# Altium PCB ECE453.PcbDoc
Units mm, origin at the board's own origin, x right, y up, seen from the top; angles counter-clockwise.
Board outline 95 x 95 mm, 2 copper layers (Top Layer, Bottom Layer); 22 components, 23 nets, 82 pads, 46 vias.
Unrouted connection lines stored in the file: 41.
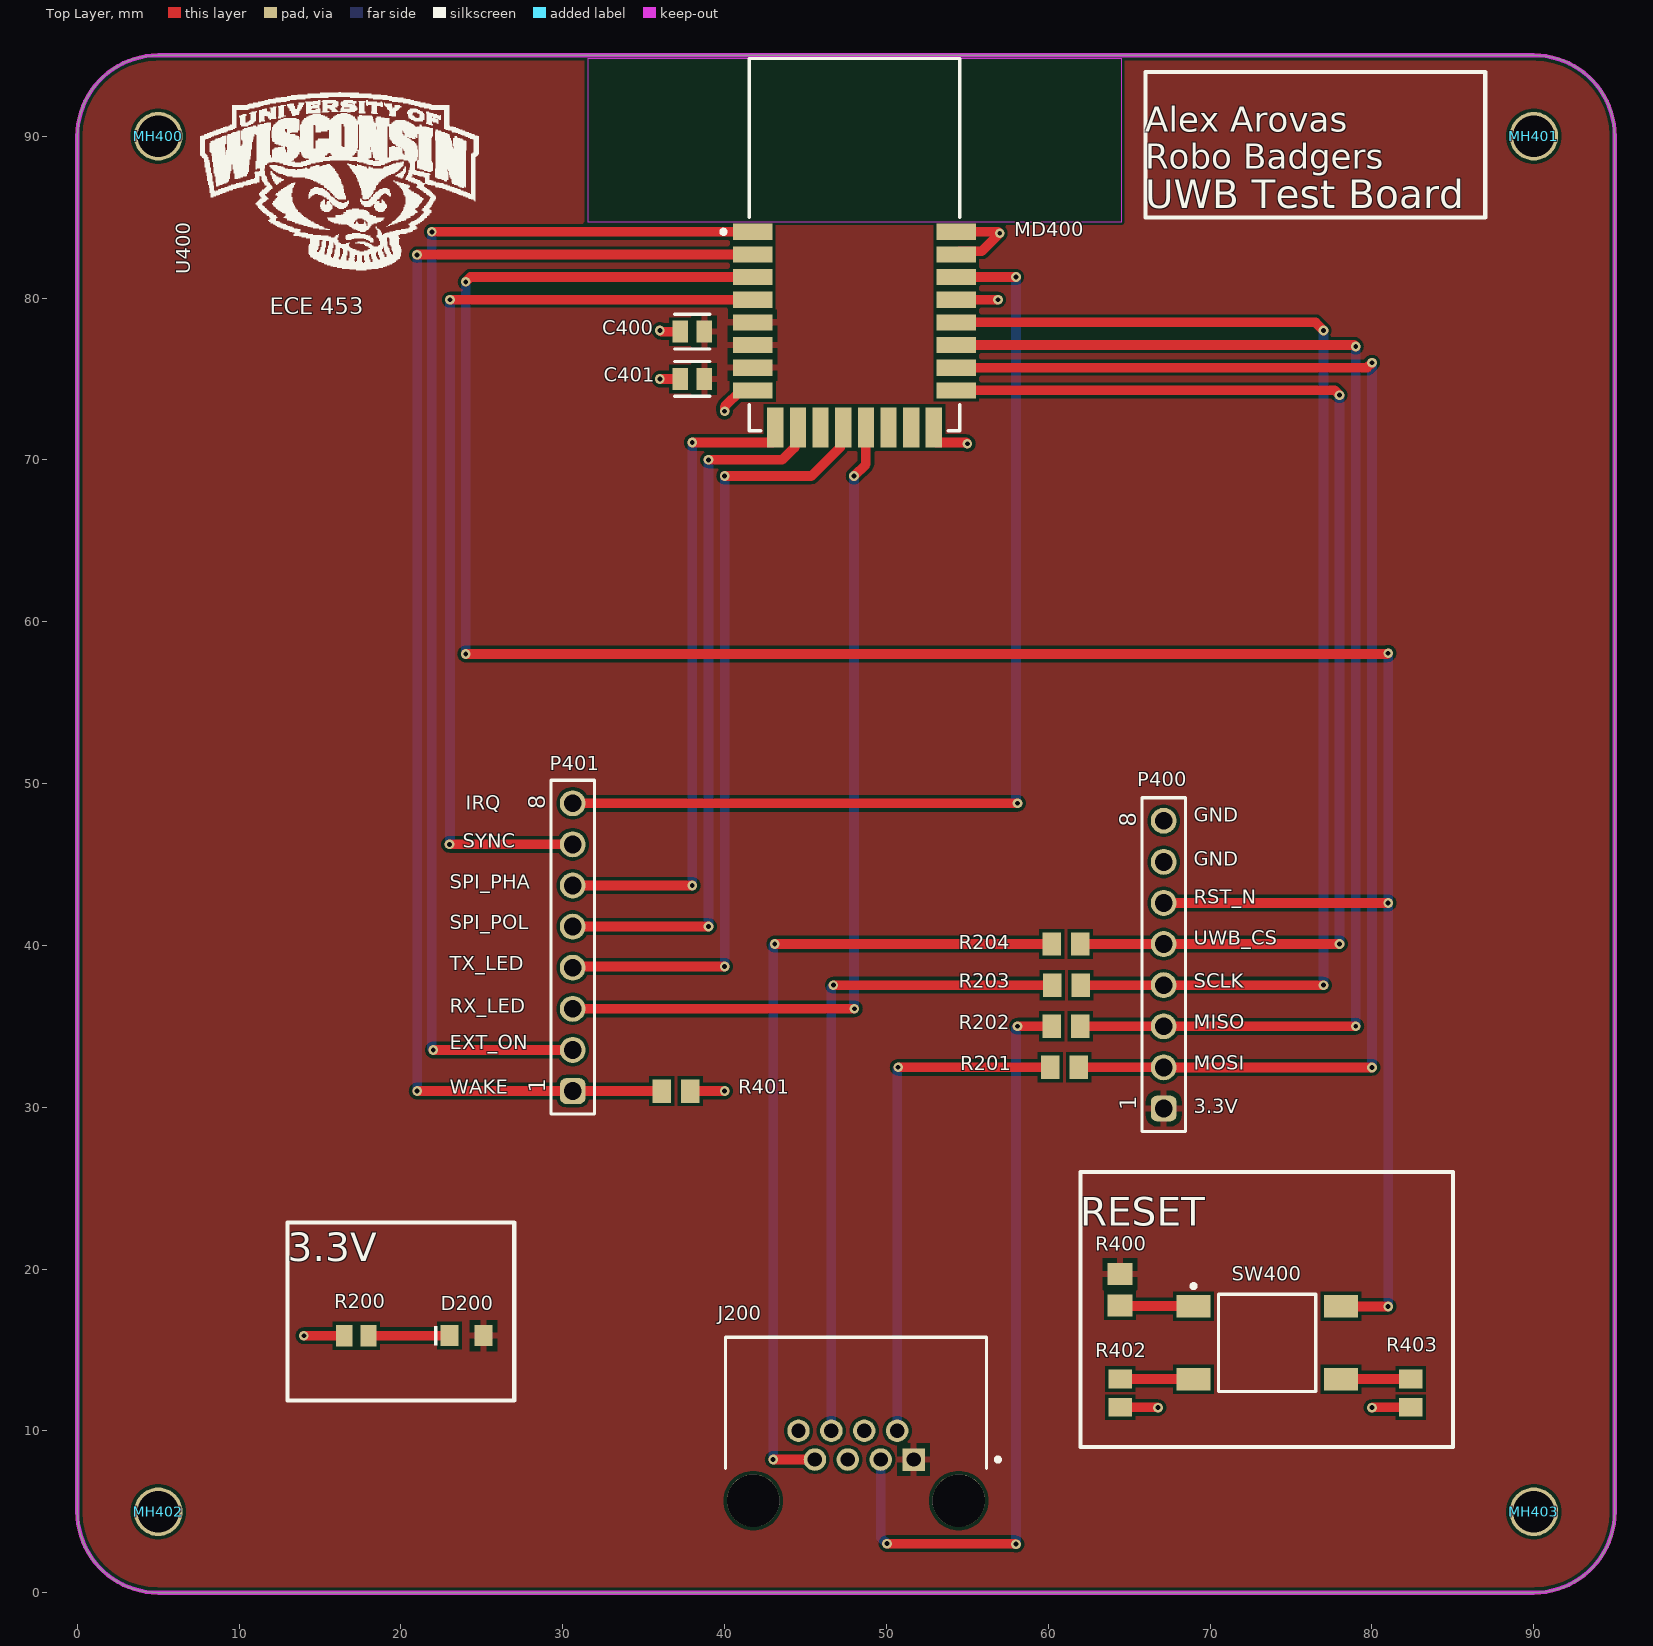
[diagram p0: Top Layer view]
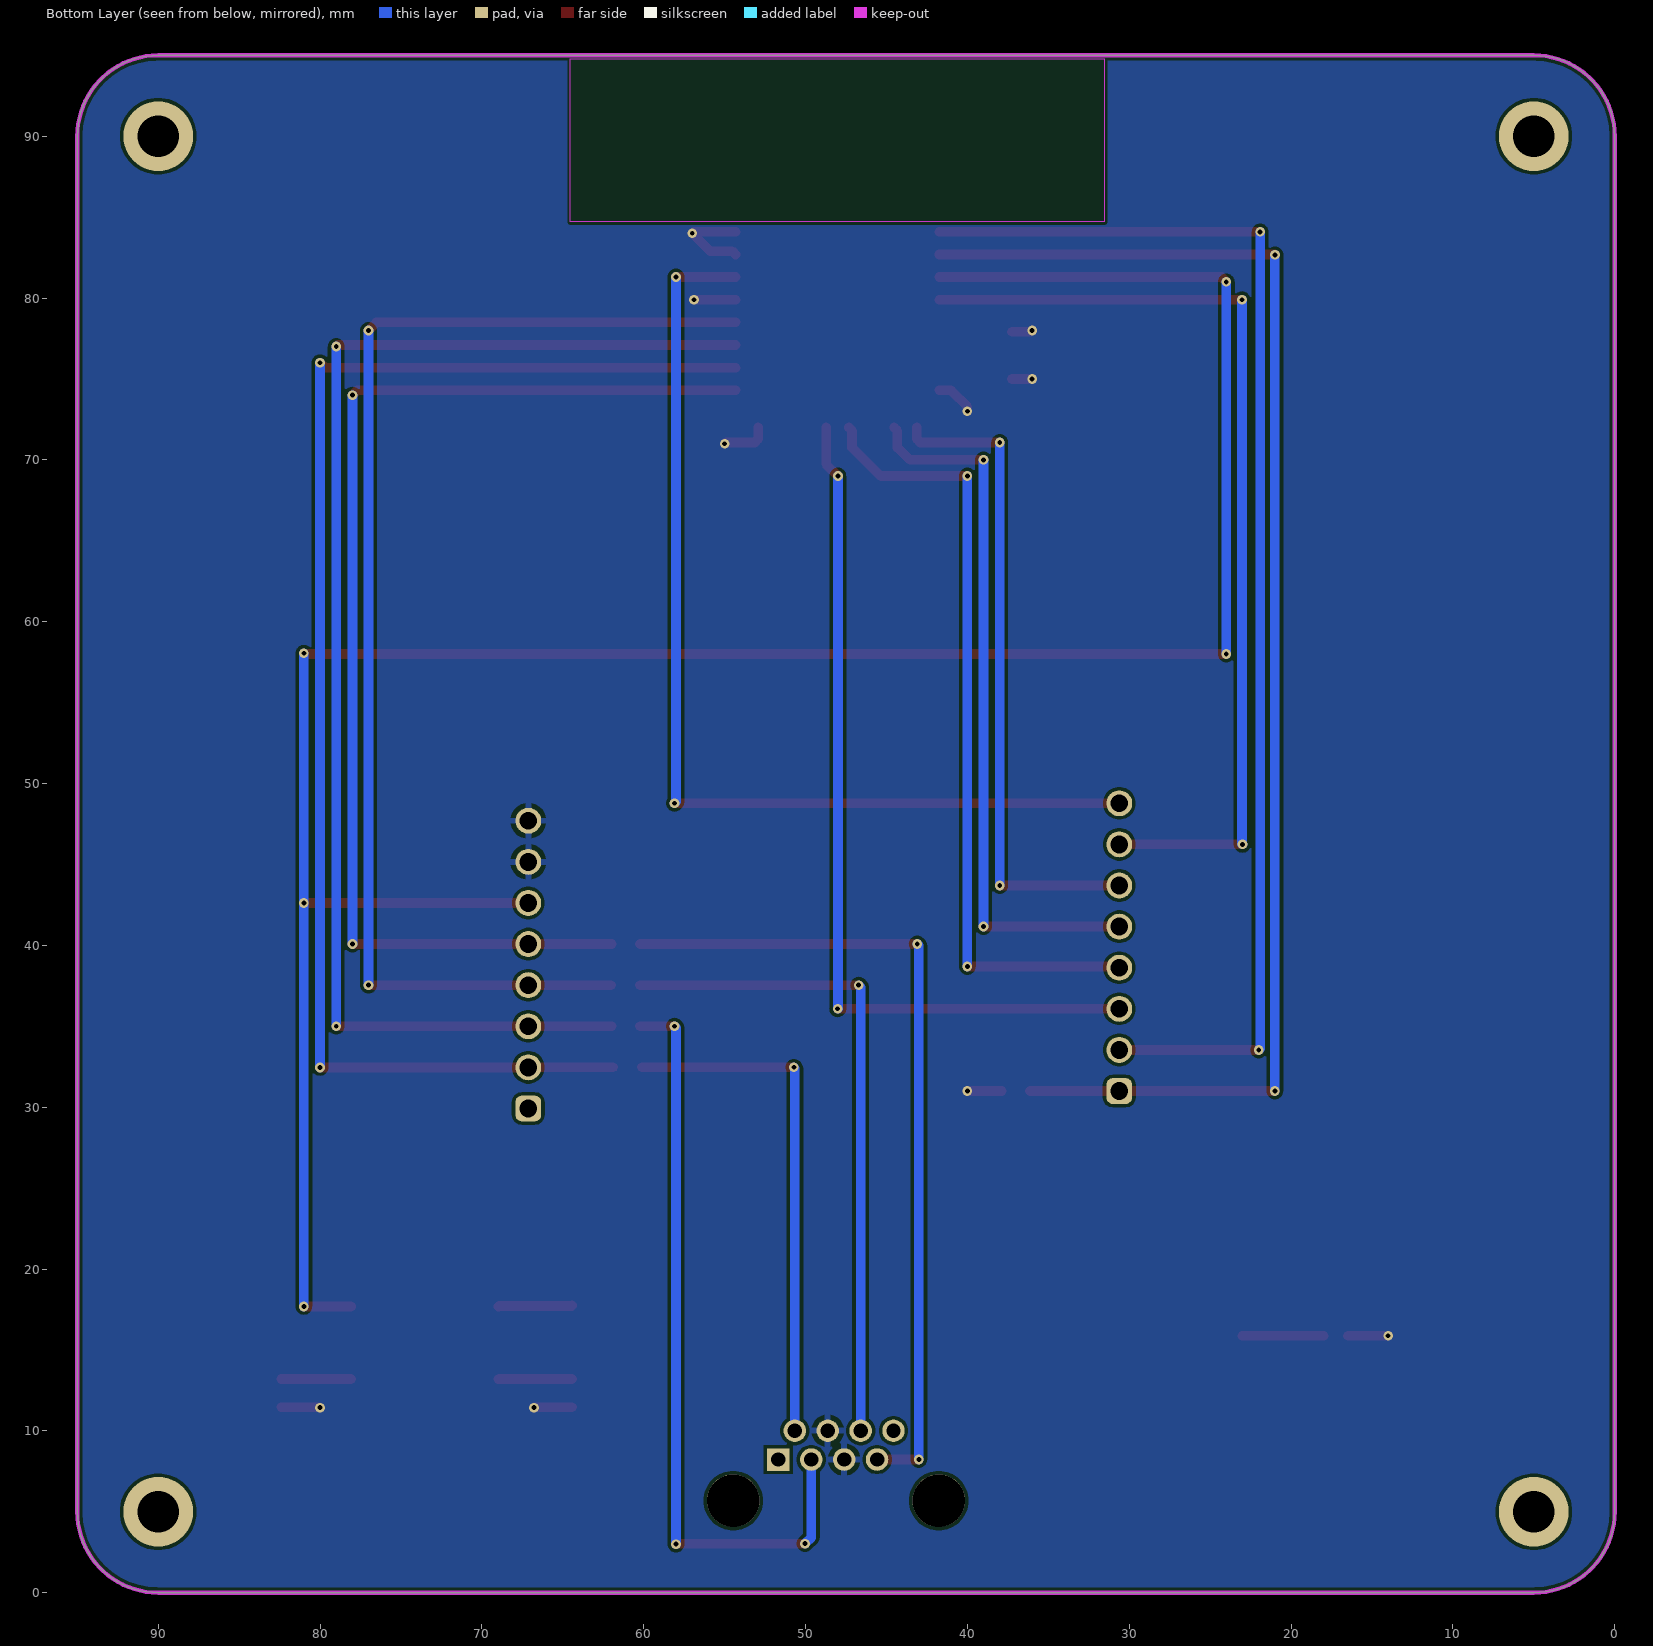
[diagram p1: Bottom Layer view, seen from below]

## Layer stack, top to bottom
Top Solder: solder mask 0.0102, Solder Resist, Dk 3.5
Top Layer: signal copper 0.0356
Dielectric1: dielectric 0.32, FR-4, Dk 4.8
Bottom Layer: signal copper 0.0356
Bottom Solder: solder mask 0.0102, Solder Resist, Dk 3.5

## Board outline
0,5 ccw(c5,5) 5,0 90,0 ccw(c90,5) 95,5 95,90 ccw(c90,90) 90,95 5,95 ccw(c5,90) 0,90

## Design rules (kind name [scope] priority, off if disabled: settings)
Clearance Polygon_Clearance [All vs InPolygon] p1: gap=0.2 ignorepadtopadclearanceinfootprint=FALSE
Clearance [All] p2: gap=0.2 ignorepadtopadclearanceinfootprint=TRUE
ComponentClearance [InComponent('U3')] p1: gap=0 collisioncheckmode=3 verticalgap=0.254 showdistances=FALSE
Height [All] p1: minheight=0 maxheight=75 prefheight=12.7
HoleSize [All] p1: absolutevalues=TRUE maxlimit=6.35 minlimit=0.3 maxpercent=80.000 minpercent=20.000
MinimumAnnularRing [All] p1: minimumring=0.15
MinimumSolderMaskSliver [All] p1: minsoldermaskwidth=0.22
NetAntennae NetAntennae_5.0V [InNet('5.0V')] p1: netantennaetolerance=0
NetAntennae NetAntennae_3.3V [InNet('3.3V')] p2: netantennaetolerance=0
PlaneClearance [All] p1: clearance=0.3
PlaneConnect [All] p1: planeconnectstyle=Relief reliefexpansion=0.3 reliefentries=4 reliefconductorwidth=0.3 reliefairgap=0.3
PolygonConnect ViaConnect [All vs IsVia] p1: connectstyle=Direct reliefconductorwidth=0.381 reliefentries=4 polygonreliefangle="90 Angle" airgapwidth=0.254
PolygonConnect [All] p2: connectstyle=Relief reliefconductorwidth=0.4 reliefentries=4 polygonreliefangle="90 Angle" airgapwidth=0.3
RoutingVias [All] p1: holewidth=0.3 width=0.6 viastyle="Through Hole" minholewidth=0.3 minwidth=0.6 maxholewidth=5 maxwidth=10
SilkToSilkClearance [All] p1: silktosilkclearance=0
SilkToSolderMaskClearance [IsPad] p1: minsilkscreentomaskgap=0 clearancetoexposedcopper=TRUE
SolderMaskExpansion [All] p1: expansion=0.102 istentingtop=FALSE
UnConnectedPin [All] p1:
Width [All] p1: maxlimit=10 minlimit=0.2 preferedwidth=0.6
21 further rules are at their usual default settings.

## Classes and differential pairs
component class 04_Mechanical: C400 C401 MD400 MH400 MH401 MH402 MH403 P400 P401 R400 R401 R402 R403 SW400 U1 U400

## Components (designator, comment, footprint, x,y, rotation, side; value= is the part's Value field where it differs from the comment)
C400 "0.10 μF" FP-C0805C-DN-MFG 38,77.922 r180 top
C401 "0.10 μF" FP-C0805C-DN-MFG 38,75 r180 top
D200 "150080GS75000" WL-SMCW_0805_150080xx75000 24.05,15.88 r0 top
J200 "RJHSE-5080" FP-RJHSE-5080-MFG 48.121,8.104 r0 top
MD400 "DWM3000TR13" FP-DWM3000TR13-MFG 48.027,83.295 r0 top
MH400 "MHOLE_2_55MM" MHOLE_2_55MM 5,90 r0 top
MH401 "MHOLE_2_55MM" MHOLE_2_55MM 90,90 r0 top
MH402 "MHOLE_2_55MM" MHOLE_2_55MM 5,5 r0 top locked
MH403 "MHOLE_2_55MM" MHOLE_2_55MM 90,5 r0 top
P400 "61300811121" 61300811121 67.132,38.81 r90 top
P401 "61300811121" 61300811121 30.614,39.89 r90 top
R200 "330R" RESC2013X60X40LL20T25 17.25,15.88 r180 top
R201 "0R" RESC2013X70X40NL20T20 61.003,32.466 r0 top
R202 "0R" RESC2013X70X40NL20T20 61.1,35.006 r0 top
R203 "0R" RESC2013X70X40NL20T20 61.125,37.541 r0 top
R204 "0R" RESC2013X70X40NL20T20 61.1,40.086 r0 top
R400 "10kR" RESC2013X70X40ML20T20 64.434,18.725 r90 top
R401 "0R" RESC2013X70X40NL20T20 37,31 r0 top
R402 "0R" RESC2013X70X40NL20T20 64.434,12.333 r90 top
R403 "0R" RESC2013X70X40NL20T20 82.393,12.333 r90 top
SW400 "" TECO-FSM4JSMA_V 73.523,15.441 r90 top
U400 "Bucky" WalkingBucky 15,80 r0 top

## Footprints (in the part's own frame and the unit in brackets; to place one, negate y for a bottom-side part, rotate by r counter-clockwise, add the part's x,y. Pads: shape width x height; smd on the part's side, far side on the other; paste and mask are expansions set on the pad)
61300811121 [mm] "Pin Header, pitch 2.54 mm, THT, Vertical, single row, 8p"
  rrect50% 1.6x1.6 hole 1.1: 1(-8.89,0)
  round 1.6 hole 1.1: 2(-6.35,0) 3(-3.81,0) 4(-1.27,0) 5(1.27,0) 6(3.81,0) 7(6.35,0) 8(8.89,0)
  silkscreen extent -10.31,-1.35 10.31,1.35, body extent -10.16,-1.27 10.16,1.27, height 8.57
FP-C0805C-DN-MFG [mm]
  rect 0.95x1.35 smd paste+0 mask+0: 1(-0.75,0) 2(0.75,0)
  silkscreen extent -1.1,-1.07 1.1,1.07, body extent -1.4,-0.85 1.4,0.85, height 0.25
FP-DWM3000TR13-MFG [mm]
  rect 2.45x1 smd paste+0 mask+0: 1(-6.295,0.8) 2(-6.295,-0.6) 3(-6.295,-2) 4(-6.295,-3.4) 5(-6.295,-4.8) 6(-6.295,-6.2) 7(-6.295,-7.6) 8(-6.295,-9) 17(6.295,-9) 18(6.295,-7.6) 19(6.295,-6.2) 20(6.295,-4.8) 21(6.295,-3.4) 22(6.295,-2) 23(6.295,-0.6) 24(6.295,0.8)
  rect 1x2.45 smd paste+0 mask+0: 9(-4.9,-11.295) 10(-3.5,-11.295) 11(-2.1,-11.295) 12(-0.7,-11.295) 13(0.7,-11.295) 14(2.1,-11.295) 15(3.5,-11.295) 16(4.9,-11.295)
  Keep-Out Layer region: -16.5,1.42 16.5,1.42 16.5,11.495 -16.5,11.495
  Keep-Out Layer region: -16.5,1.42 16.5,1.42 16.5,11.495 -16.5,11.495
  silkscreen extent -8.22,-11.5 6.5,11.5, body extent -7.62,-12.62 7.62,11.6, height 0.25
FP-RJHSE-5080-MFG [mm]
  rect 1.39x1.39 hole 0.89 paste-1000 mask+0: 1(3.556,0.127)
  round 1.39 hole 0.89 paste-1000 mask+0: 2(2.54,1.905) 3(1.524,0.127) 4(0.508,1.905) 5(-0.508,0.127) 6(-1.524,1.905) 7(-2.54,0.127) 8(-3.556,1.905)
  round 3.25 hole 3.25 unplated paste-1000 mask+0: ""(-6.35,-2.413) ""(6.35,-2.413)
  silkscreen extent -8.06,-0.41 8.89,7.68, body extent -8.16,-7.78 8.16,7.78, height 0.25
MHOLE_2_55MM [mm]
  round 3 / inner round 4.572 / far side round 4.318 hole 2.55: 1(0,0)
RESC2013X60X40LL20T25 [mm] "Chip Resistor, 2-Leads, Body 2.00x1.25mm, IPC High Density"
  rect 1x1.35 smd: 1(-0.75,0) 2(0.75,0)
  body extent -1.1,-0.72 1.1,0.72, height 0.6
RESC2013X70X40ML20T20 [mm] "Chip Resistor, 2-Leads, Body 2.00x1.25mm, IPC Low Density"
  rect 1.35x1.55 smd: 1(-0.975,0) 2(0.975,0)
  body extent -1.1,-0.72 1.1,0.72, height 0.7
RESC2013X70X40NL20T20 [mm] "Chip Resistor, 2-Leads, Body 2.00x1.25mm, IPC Medium Density"
  rect 1.15x1.45 smd: 1(-0.875,0) 2(0.875,0)
  body extent -1.1,-0.72 1.1,0.72, height 0.7
TECO-FSM4JSMA_V [mm] "SMD, 4-Leads, Body 6x6mm, Pitch 4.5mm"
  rect 1.4x2.1 smd: 1(2.25,4.55) 2(2.25,-4.55) 3(-2.25,4.55) 4(-2.25,-4.55)
  silkscreen extent -3,-3 3.62,4.67, body extent -3,-5 3,5, height 5.08
WalkingBucky [mm]
  silkscreen extent -7.42,1.75 9.8,12.73
WL-SMCW_0805_150080xx75000 [mm] "SMD Mono-color Chip LED, body 2.0x1.25mm"
  rect 1.1x1.3 smd: 1(-1.05,0) 2(1.05,0)
  silkscreen extent -2,-0.6 -1.8,0.6, body extent -1,-0.63 1,0.62, height 0.7

## Part data
C400 C401: library part CMP-2007-00279-2, "CAP CER 0.1UF 50V X7R 0805", Case Code (Imperial)=0805, Case Code (Metric)=2012, Dielectric=X7R, Manufacturer=KEMET, Manufacturer Part Number=C0805C104K5RACTU, Max Operating Temperature=125°C, Min Operating Temperature=-55°C, Package=C0805C-DN, Package Quantity=4000, Supplier Part Number=399-C0805C104K5RAC7800CT-ND, Temperature="-55°C to +125°C", Temperature Coefficient=30ppm/°C, Temperature Range High=+125°C, Tolerance=0.1, Voltage=500V, Voltage Rating="50 V", Voltage Rating (DC)=50V, Automotive=No, Capacitance="0.10 μF", Case/Package=0805, Category=Cap, ComponentLink1Description=https://datasheet.ciiva.com/32431/slceramic-chip-condensers-e-32431755.pdf?src-supplier=Distrelec, ComponentLink1URL=https://datasheet.ciiva.com/32431/slceramic-chip-condensers-e-32431755.pdf?src-supplier=Distrelec, ComponentLink2Description=Datasheet, ComponentLink2URL=https://content.kemet.com/datasheets/KEM_C1003_C0G_SMD.pdf, ComponentLink3Description=https://datasheet.ciiva.com/28682/1851736-28682232.pdf?src-supplier=Element14, ComponentLink3URL=https://datasheet.ciiva.com/28682/1851736-28682232.pdf?src-supplier=Element14, ComponentLink4Description=https://datasheet.ciiva.com/18410/70095383-18410815.pdf?src-supplier=Allied+Electronics, ComponentLink4URL=https://datasheet.ciiva.com/18410/70095383-18410815.pdf?src-supplier=Allied+Electronics, ComponentLink5Description=https://datasheet.ciiva.com/14589/70095383-14589048.pdf?src-supplier=Allied+Electronics, ComponentLink5URL=https://datasheet.ciiva.com/14589/70095383-14589048.pdf?src-supplier=Allied+Electronics, Construction=Flat, Depth=1.25mm, Device Class L1="Passive Components", Device Class L2=Capacitors, Device Class L3="Ceramic Capacitors", Digikey Description="CAP CER 0.1UF 50V X7R 0805", Height=0.88mm, Ipc Land Pattern Name=CAPC200125X78, Lead Free=Yes, Lead Pitch=0.75mm, Length=2mm, Material=Ceramic, Mounting Technology="Surface Mount,PCB", Mouser Description="Cap Ceramic 0.1uF 50V X7R 10% SMD 2.0 x 1.2 mm 125 C Paper T/R", Octopart=https://octopart.com/c0805c104k5ractu-kemet-143926, Packaging="Tape and Reel", Pins=2, Pricing="1=0.14, 10=0.091, 50=0.0546, 100=0.043, 500=0.03172, 1000=0.02627 (USD)", Radiation Hardening=No, Reach SVHC Compliant=No, RoHS=TRUE, RoHS Compliant=Yes, Series="SMD Comm X7R", Stock=1813524, Supplier=Digikey, Temperature Characteristic=X7R, Temperature Range Low=-55°C, Termination=SMD/SMT, Width=1.2mm
D200: library part CMP-1426-00007-2, Case Code (Imperial)=0805, Case Code (Metric)=2012, Color=Green, Forward Current=100mA, Forward Voltage=3.2V, Lens Color=Colorless, Manufacturer="Wurth Electronics", Max Junction Temperature (Tj)=95°C, Max Operating Temperature=85°C, Max Reverse Voltage (DC)=5V, Min Operating Temperature=-40°C, Package Quantity=1, Power Dissipation=105mW, Supplier Part Number=732-4983-1-ND, Test Current=20mA, Case/Package=0805, Category=LEDs, ComponentLink1Description=https://datasheet.ciiva.com/29563/150080gs75000-29563008.pdf?src-supplier=Digikey, ComponentLink1URL=https://datasheet.ciiva.com/29563/150080gs75000-29563008.pdf?src-supplier=Digikey, ComponentLink2Description=https://datasheet.ciiva.com/29279/759434-da-01-en-chipled-0805-w-kl-gruen-150080gs75000-29279039.pdf?src-supplier=Conrad, ComponentLink2URL=https://datasheet.ciiva.com/29279/759434-da-01-en-chipled-0805-w-kl-gruen-150080gs75000-29279039.pdf?src-supplier=Conrad, Dominant Wavelength=525nm, Height=700µm, Length=2mm, Lens Size=1.25mm, Lens Style="Clear, Rectangular", Lens Transparency=Clear, Luminous Intensity=450mcd, Manufacturer Part Number=150080GS75000, Mount="Surface Mount", Mounting Technology="Surface Mount", NexarPartId=29717780, Packaging="Tape and Reel", Peak Wavelength=515nm, Pricing="1=0.19, 50=0.176, 100=0.151, 500=0.131 (USD)", REACH SVHC=Unknown, Reach SVHC Compliant=Unknown, Reverse Voltage=5V, RoHS=Compliant, RoHS Compliant=Yes, Series=WL-SMCW, Stock=29733, Supplier=Digikey, Viewing Angle=140°, Wavelength=520nm, Width=1.25mm
J200: library part CMP-02366-000003-1, "CONN MOD JACK 8P8C R/A UNSHLD", Contact Resistance=20mR, Current Rating=1.5A, Manufacturer=Amphenol, Max Voltage Rating (AC)=125V, Package=CONN_MOD_JACK, Supplier Part Number=RJHSE-5080-ND, Temperature="-55°C to +85°C", Temperature Range High=+85°C, Temperature Range Low=-55°C, Automotive=No, Category=Conn, ComponentLink1Description=https://datasheet.ciiva.com/7629/1682821-7629402.pdf?src-supplier=Element14, ComponentLink1URL=https://datasheet.ciiva.com/7629/1682821-7629402.pdf?src-supplier=Element14, ComponentLink2Description=Datasheet, ComponentLink2URL=https://cdn.amphenol-icc.com/media/wysiwyg/files/documentation/datasheet/inputoutput/io-modjack-rjhse.pdf, ComponentLink3Description=https://datasheet.ciiva.com/1432/1693748-1432448.pdf?src-supplier=Element14, ComponentLink3URL=https://datasheet.ciiva.com/1432/1693748-1432448.pdf?src-supplier=Element14, Conn Gender=Female, Conn Orientation="Right Angle", Connector Type=RJ45, Contact Material=Gold,Nickel, Contact Plating=Gold, Depth=14.99mm, Device Class L1=Connectors, Device Class L2="Modular / Ethernet Connectors", Device Class L3=unset, Digikey Description="CONN MOD JACK 8P8C R/A UNSHLD", Footprint Url=https://cdn.amphenol-icc.com/media/wysiwyg/files/drawing/rjhse5080.pdf?__cf_chl_jschl_tk__=e349db0bbbb6188a39347cd5e541b92fa02c9719-1587748343-0-AW7tChdeHzRPLX9gSWj7WrKaXQoY9BsmT9Ek0h-T62M9y3Rs9iypFcOtkzb-6sGYQEjFE-jcoNciDETCOZrh1rYyOesac5SvYLoLwHIsHvF4AKBlx-MXmfZUVk9OTTJLqyQq2qMm0PFRLJpNcK0nrKResqOniRSYixG2sPTmOPraH-ULJFBDL602CHqcI9KKBgTq90Jh1OL2Td4moJ99rFsJRJ1Tk_uoxGe8ublcP_ARu-uLpWcQrBcwOcHDTAwL29DAwVaqcH7ta8Ks7WMlHmVl_pILeEDwT0bE9vu5Pa5S3PtNRF1leuFkgi_FMbUxTDulc5xzbXSfng8srUIV1lWXny5nx1fZJEUa_w97yKjffzBMxiWLWVN-V7-uqAaPbyv_m-wRyw5O25OZNyJOeGU, Gender=Female, Height=0.535inch, Is Female=yes, Lead Free=Yes, Length=15.75mm, Manufacturer Part Number=RJHSE-5080, Max Current Rating=1.5A, Mounting Technology="Through Hole,Panel", Mouser Description="Modular Connectors / Ethernet Connectors R/A RJ45 NONSHIELDED 8 CONT NO LEDS", Number Of Contacts=8, Number of Ports=1, Number of Positions=8, Number of Positions Loaded=8, Octopart=https://octopart.com/rjhse-5080-amphenol-45060, Orientation="Right Angle", Packaging=Rail/Tube, Pitch=1.02mm, Pricing="1=1.03, 10=0.867, 25=0.832, 50=0.8142, 100=0.7788, 250=0.708, 500=0.6372, 1000=0.56641, 2500=0.51331 (USD)", Radiation Hardening=No, Reach SVHC Compliant=Unknown, RoHS=TRUE, RoHS Compliant=Yes, Stock=72112, Supplier=Digikey, Termination=Solder, Voltage Rating=125V, Voltage Rating (DC)=125V
MD400: library part CMP-231853-000002-1, "DWM3000 module Freq: 7.9872 GHz 6.8Mbps SPI 2.5-3.6V 8 GPIO's"
MH400 MH401 MH402 MH403: "Mounting Holde", Manufacturer Part Number="UW MTHOLE"
P400 P401: library part CMP-1502-01076-2, Color=Black, Contact Resistance=20mΩ, Current Rating=3A, Manufacturer="Wurth Electronics", Max Operating Temperature=105°C, Min Operating Temperature=-40°C, Operating Supply Voltage=250V, Supplier Part Number=732-5321-ND, Category="Headers and Wire Housings", ComponentLink1Description=https://datasheet.octopart.com/61300811121-W%C3%BCrth-Elektronik-datasheet-21154836.pdf?src-supplier=Element14, ComponentLink1URL=https://datasheet.octopart.com/61300811121-W%C3%BCrth-Elektronik-datasheet-21154836.pdf?src-supplier=Element14, ComponentLink2Description=https://katalog.we-online.de/em/datasheet/6130xx11121.pdf?src-supplier=Digikey, ComponentLink2URL=https://katalog.we-online.de/em/datasheet/6130xx11121.pdf?src-supplier=Digikey, Connector Type="Male Pin", Contact Material=Copper, Contact Mating Length=5.9944mm, Contact Plating=Gold, Contact Type="Male Pin", Gender=Male, Height=8.54mm, Lead Pitch=2.54mm, Manufacturer Part Number=61300811121, Mount="Through Hole", Mounting Technology="Through Hole", NexarPartId=32855533, Number Of Contacts=8, Number of Pins=8, Number of Positions=8, Number of Rows=1, Orientation=Vertical, Packaging=Bulk, Pitch=2.54mm, Pricing="1=0.4, 10=0.336, 25=0.28, 50=0.234, 100=0.212, 1000=0.193 (USD)", REACH SVHC=Unknown, Reach SVHC Compliant=Unknown, RoHS=Compliant, RoHS Compliant=Yes, Series=WR-PHD, Stock=13018, Supplier=Digikey, Termination=Solder, Voltage Rating=250V
R200: library part CMP-2001-00628-1, Case/Package=0805, Manufacturer=Panasonic, Manufacturer Part Number=ERA-6AEB331V, Max Operating Temperature=155°C, Min Operating Temperature=-55°C, Package Height=0.5mm, Package Length=2mm, Package Style=SMTMeter, Package Width=1.25mm, Part Number=ERA6AEB331V, Power=125mW, Rated Temperature=85°C, Resistor Type="FIXED RESISTOR", Supplier Part Number=P330DACT-ND, Temperature Coefficient=25ppm/°C, Tolerance=0.1%, Working Voltage=100V, Category="Chip SMD Resistors", ComponentLink1Description=https://datasheet.ciiva.com:443/pdfs/VipMasterIC/IC/PANA/PANA-S-A0009459258/PANA-S-A0009459258-1.pdf?src-supplier=IHS+Markit, ComponentLink1URL=https://datasheet.ciiva.com:443/pdfs/VipMasterIC/IC/PANA/PANA-S-A0009459258/PANA-S-A0009459258-1.pdf?src-supplier=IHS+Markit, ComponentLink2Description=https://datasheet.ciiva.com/11808/0900766b80eb1d8c-11808093.pdf?src-supplier=Rs, ComponentLink2URL=https://datasheet.ciiva.com/11808/0900766b80eb1d8c-11808093.pdf?src-supplier=Rs, ComponentLink3Description=https://datasheet.ciiva.com/29184/452857-da-01-en-widerstand-0805-era-29184079.pdf?src-supplier=Conrad, ComponentLink3URL=https://datasheet.ciiva.com/29184/452857-da-01-en-widerstand-0805-era-29184079.pdf?src-supplier=Conrad, ComponentLink4Description=https://datasheet.ciiva.com/30237/54aoa0000ce26-30237450.pdf?src-supplier=Onlinecomponents.com, ComponentLink4URL=https://datasheet.ciiva.com/30237/54aoa0000ce26-30237450.pdf?src-supplier=Onlinecomponents.com, ComponentLink5Description=https://datasheet.ciiva.com/16777/70068849-16777611.pdf?src-supplier=Allied+Electronics, ComponentLink5URL=https://datasheet.ciiva.com/16777/70068849-16777611.pdf?src-supplier=Allied+Electronics, ComponentLink6Description=https://datasheet.ciiva.com/9182/aoa0000ce26-9182968.pdf?src-supplier=Avnet, ComponentLink6URL=https://datasheet.ciiva.com/9182/aoa0000ce26-9182968.pdf?src-supplier=Avnet, ComponentLink7Description=https://datasheet.ciiva.com/48536/era-eng-tds-48536857.pdf?src-supplier=Distrelec, ComponentLink7URL=https://datasheet.ciiva.com/48536/era-eng-tds-48536857.pdf?src-supplier=Distrelec, ComponentLink8Description=https://datasheet.ciiva.com/22744/1776116-22744153.pdf?src-supplier=Element14, ComponentLink8URL=https://datasheet.ciiva.com/22744/1776116-22744153.pdf?src-supplier=Element14, ComponentLink9Description=https://datasheet.ciiva.com/46436/485442-46436606.pdf?src-supplier=Element14, ComponentLink9URL=https://datasheet.ciiva.com/46436/485442-46436606.pdf?src-supplier=Element14, ComponentLink10Description=https://datasheet.ciiva.com/6138/485442-6138585.pdf?src-supplier=Farnell, ComponentLink10URL=https://datasheet.ciiva.com/6138/485442-6138585.pdf?src-supplier=Farnell, ComponentLink11Description=https://datasheet.ciiva.com/6138/485442-6138589.pdf?src-supplier=Farnell, ComponentLink11URL=https://datasheet.ciiva.com/6138/485442-6138589.pdf?src-supplier=Farnell, ComponentLink12Description=https://datasheet.ciiva.com/22759/485442-22759176.pdf?src-supplier=Farnell, ComponentLink12URL=https://datasheet.ciiva.com/22759/485442-22759176.pdf?src-supplier=Farnell, ComponentLink13Description=https://datasheet.ciiva.com/43457/485442-43457816.pdf?src-supplier=Farnell, ComponentLink13URL=https://datasheet.ciiva.com/43457/485442-43457816.pdf?src-supplier=Farnell, ComponentLink14Description=https://datasheet.ciiva.com/24164/aoa0000ce26-197354-24164407.pdf?src-supplier=Mouser, ComponentLink14URL=https://datasheet.ciiva.com/24164/aoa0000ce26-197354-24164407.pdf?src-supplier=Mouser, Construction=Rectangular, JESD-609 Code=e3, Mounting Technology="Surface Mount", Packaging="Tape and Reel", Pins=2, Pricing="1=0.13, 10=0.095, 50=0.0748, 100=0.067, 500=0.05106, 1000=0.04511 (USD)", Reach SVHC Compliant=Yes, Reference Standard=AEC-Q200, RoHS=Yes, RoHS Compliant=Yes, Stock=18932, Supplier=Digikey, Technology="THIN FILM", Terminal Finish=Nickel, Termination=Wraparound
R201 R202 R203 R204 R401: library part CMP-1665-00002-5, "Chip Resistor, 0 Ohm, +/- 1%, 0.125 W, -55 to 155 degC, 0805 (2012 Metric), RoHS, Tape and Reel", Case Code (Imperial)=0805, Case Code (Metric)=2012, Manufacturer=Panasonic, Manufacturer Part Number=ERJ-6GEY0R00V, Max Operating Temperature="155 degC", Min Operating Temperature="-55 degC", Package Height=0.6mm, Package Length=2mm, Package Quantity=5000, Package Shape=Rectangular, Package Style=SMTMeter, Package Width=1.25mm, Power=125mW, Rated Temperature=70°C, Resistance="0 Ohm", Resistor Type="FIXED RESISTOR", Supplier Part Number=P0.0ACT-ND, Tolerance=5%, Case/Package=0805, Category="Chip SMD Resistors", ComponentLink1Description="Manufacturer URL", ComponentLink1URL=http://www.panasonic.com/, ComponentLink2Description=Datasheet, ComponentLink2URL=http://industrial.panasonic.com/cdbs/www-data/pdf/RDA0000/AOA0000C84.pdf, ComponentLink3Description=https://datasheet.ciiva.com:443/pdfs/VipMasterIC/IC/PANA/PANA-S-A0009459603/PANA-S-A0009459603-1.pdf?src-supplier=IHS+Markit, ComponentLink3URL=https://datasheet.ciiva.com:443/pdfs/VipMasterIC/IC/PANA/PANA-S-A0009459603/PANA-S-A0009459603-1.pdf?src-supplier=IHS+Markit, ComponentLink4Description=https://datasheet.ciiva.com/36526/1989607-36526237.pdf?src-supplier=Jameco, ComponentLink4URL=https://datasheet.ciiva.com/36526/1989607-36526237.pdf?src-supplier=Jameco, ComponentLink5Description=https://datasheet.ciiva.com/11821/0900766b80f806dd-11821735.pdf?src-supplier=Rs, ComponentLink5URL=https://datasheet.ciiva.com/11821/0900766b80f806dd-11821735.pdf?src-supplier=Rs, ComponentLink6Description=https://datasheet.ciiva.com/43460/1678796-43460073.pdf?src-supplier=Farnell, ComponentLink6URL=https://datasheet.ciiva.com/43460/1678796-43460073.pdf?src-supplier=Farnell, ComponentLink7Description=https://datasheet.ciiva.com/46377/1678796-46377866.pdf?src-supplier=Element14, ComponentLink7URL=https://datasheet.ciiva.com/46377/1678796-46377866.pdf?src-supplier=Element14, ComponentLink8Description=https://datasheet.ciiva.com/28695/1678796-28695877.pdf?src-supplier=Element14, ComponentLink8URL=https://datasheet.ciiva.com/28695/1678796-28695877.pdf?src-supplier=Element14, ComponentLink9Description=https://datasheet.ciiva.com/9117/aoa0000ce1-9117354.pdf?src-supplier=Avnet, ComponentLink9URL=https://datasheet.ciiva.com/9117/aoa0000ce1-9117354.pdf?src-supplier=Avnet, Construction=Rectangular, DatasheetVersion=03/2015, Height="0.6 mm", JESD-609 Code=e3, Length="2 mm", Mounting Technology="Surface Mount", PackageDescription="2-Pin Surface Mount Device, Body 2 x 1.25 mm", Packaging="Tape and Reel", PartNumber=ERJ-6GEY0R00V, Pins=2, Pricing="1=0.1, 10=0.057, 25=0.0432, 50=0.033, 100=0.0231, 250=0.01856, 500=0.01484, 1000=0.01092 (USD)", Radiation Hardening=No, REACH SVHC="No SVHC", Reach SVHC Compliant=Yes, Reference Standard=AEC-Q200, RoHS=Yes, RoHS Compliant=Yes, RoHSCompliant=True, Stock=179566, Supplier=Digikey, Technology="METAL GLAZE/THICK FILM", Terminal Finish=Nickel, Termination=Wraparound, Width="1.25 mm"
R400: library part CMP-2001-04376-1, Manufacturer=Panasonic, Part Number=ERJ-6ENF1002V
R402 R403: library part CMP-1665-00002-5, "Chip Resistor, 0 Ohm, +/- 1%, 0.125 W, -55 to 155 degC, 0805 (2012 Metric), RoHS, Tape and Reel", Case Code (Imperial)=0805, Case Code (Metric)=2012, Max Operating Temperature="155 degC", Min Operating Temperature="-55 degC", Package Quantity=5000, PartNumber=ERJ-6GEY0R00V, Resistance="0 Ohm", Tolerance=5%, Case/Package=0805, ComponentLink1Description="Manufacturer URL", ComponentLink1URL=http://www.panasonic.com/, ComponentLink2Description=Datasheet, ComponentLink2URL=http://industrial.panasonic.com/cdbs/www-data/pdf/RDA0000/AOA0000C84.pdf, DatasheetVersion=03/2015, Height="0.6 mm", Length="2 mm", Mounting Technology="Surface Mount", PackageDescription="2-Pin Surface Mount Device, Body 2 x 1.25 mm", Packaging="Tape and Reel", Radiation Hardening=No, REACH SVHC="No SVHC", RoHSCompliant=True, Width="1.25 mm"
SW400: library part CMP-2000-05602-2, "Swicth, SPST, 24 V, -35 to 85 degC, 4-Pin SMD, RoHS, Tape and Reel", Case\/Package=SMD/SMT, Contact Current Rating=50mA, Contact Resistance=100mOhm, Manufacturer="TE Connectivity", Max Operating Temperature=85degC, Max Voltage Rating (DC)=12V, Min Operating Temperature=-35degC, Operating Force=1.57N, Package Description="4-Pin Surface Mount Device, Body 6 x 6 mm, Pitch 4.5 mm", Package Quantity=750, Package Reference=FSM4JSMA, Voltage Rating=24V, Actuator Length=0.055inch, Actuator Material=Polyamide, Contact Material=CopperAlloy, Contact Plating=Silver, Current Rating=50mA, Datasheet URL=http://www.te.com/commerce/DocumentDelivery/DDEController?Action=showdoc&DocId=Customer+Drawing%7F2-1437565-7%7FV%7Fpdf%7FEnglish%7FENG_CD_2-1437565-7_V.pdf%7F4-1437565-2, Datasheet Version="Rev. V, 02/2015", Electrical Life=100000Cycles, Illumination Type=Illuminated, Length=6mm, Manufacturer URL=http://www.te.com/, Mechanical Life=100000Cycles, Mount=SurfaceMount, Mounting Technology=SurfaceMount, Orientation=Straight, Packaging=LoosePiece, REACH SVHC=Unknown, RoHSCompliant=true, Switch Travel=0.25mm, Termination=GullWing, Throw Configuration=SPST, Voltage Rating (DC)=24V, Width=6mm
U400: "Bucky Badger Image", Manufacturer Part Number="UW Bucky"

## Via types
v1: diameter 0.6, hole 0.3, Top Layer to Bottom Layer, 46 vias

## Nets (pads, with @x,y where several pads share a name; then routed paths per layer and width w, separated by ;. In a path a pad name is that pad's centre, name@x,y a point inside that pad or via, vN(x,y) a via of type N, cw(c..) or ccw(c..) an arc to the next point about the centre after c; other vN are vias at no path point)
3.3V: C400.1 C401.1 D200.2 J200.1 MD400.5 MD400.6 MD400.7 P400.1 R400.2
EXT_ON: MD400.1 P401.2 | length 79
  Top Layer w0.6: v1(21.909,84.089) 21.914,84.095 MD400.1 ; v1(22,33.54) P401.2
  Bottom Layer w0.6: v1(21.909,84.089) 21.909,33.631 v1(22,33.54)
GND: C400.2 C401.2 J200.4 J200.5 MD400.8 MD400.16 MD400.21 MD400.23 MD400.24 P400.7 P400.8 R200.2 R401.2 R402.1 R403.1 | length 26.2
  Top Layer w0.6: v1(14,15.88) R200.2 ; v1(36,75) C401.2 ; v1(36,78) 36.078,77.922 C400.2 ; R401.2 v1(40,31) ; v1(40,73) 40,73.288 41.007,74.295 MD400.8 ; J200.5 J200.5@47.764,8.382 ; J200.4@48.629,9.795 J200.4 ; MD400.16 52.927,71.275 53.127,71.075 54.925,71.075 v1(55,71) ; MD400.21 v1(56.895,79.895) ; MD400.23 54.522,82.895 55.895,82.895 v1(57,84) 56.905,84.095 MD400.24 ; R402.1 66.753,11.458 v1(66.773,11.438) ; v1(80,11.438) 80.02,11.458 R403.1
IRQ: MD400.22 P401.8 | length 63.7
  Top Layer w0.6: P401.8 v1(58.099,48.78) ; MD400.22 v1(58,81.295)
  Bottom Layer w0.6: v1(58,81.295) 58,48.879 v1(58.099,48.78)
MISO: J200.3 R202.1 | length 47.5
  Top Layer w0.6: v1(50.03,3.033) 57.967,3.033 v1(58,3) ; v1(58.099,35.006) R202.1
  Bottom Layer w0.6: J200.3 49.645,3.418 v1(50.03,3.033) ; v1(58,3) 58,34.907 v1(58.099,35.006)
MISO_R: MD400.19 P400.3 R202.2 | length 83.7
  Top Layer w0.6: MD400.19 78.905,77.095 v1(79,77) ; R202.2 61.978,35.003 67.129,35.003 P400.3 78.994,35 v1(79,35.006)
  Bottom Layer w0.6: v1(79,35.006) v1(79,77)
MOSI: J200.2 R201.1 | length 31.9
  Top Layer w0.6: v1(50.723,32.466) R201.1
  Bottom Layer w0.6: J200.2 50.661,32.404 v1(50.723,32.466)
MOSI_R: MD400.18 P400.2 R201.2 | length 87.5
  Top Layer w0.6: MD400.18 79.695,75.695 v1(80,76) ; R201.2 61.881,32.463 67.129,32.463 P400.2 v1(80,32.46)
  Bottom Layer w0.6: v1(80,32.46) v1(80,76)
PB_3_R: R402.2 SW400.3 | length 4.5
  Top Layer w0.6: R402.2 64.442,13.2 68.964,13.2 SW400.3
PB_4_R: R403.2 SW400.4 | length 4.3
  Top Layer w0.6: SW400.4 78.081,13.2 82.385,13.2 R403.2
PB_RST: R400.1 SW400.1 | length 4.6
  Top Layer w0.6: R400.1 64.463,17.721 68.943,17.721 SW400.1
PWR_ON: D200.1 R200.1 | length 5
  Top Layer w0.6: R200.1 D200.1
RST_N_R: MD400.3 P400.6 SW400.2 | length 155
  Top Layer w0.6: v1(24,58) 80.951,58 v1(81,58.049) ; v1(24,81) 24.295,81.295 MD400.3 ; P400.6@67.129,42.623 P400.6 v1(81,42.62) ; SW400.2 v1(81,17.691)
  Bottom Layer w0.6: v1(24,58) v1(24,81) ; v1(81,17.691) v1(81,42.62) v1(81,58.049)
RX_LED: MD400.13 P401.3 | length 53.6
  Top Layer w0.6: P401.3 v1(48.018,36.08) ; v1(48,69) 48.727,69.727 MD400.13
  Bottom Layer w0.6: v1(48,69) 48,36.098 v1(48.018,36.08)
SCLK: J200.6 R203.1 | length 41.1
  Top Layer w0.6: J200.6 J200.6@46.604,10.016 ; v1(46.717,37.541) R203.1
  Bottom Layer w0.6: J200.6 46.597,37.421 v1(46.717,37.541)
SCLK_R: MD400.20 P400.4 R203.2 | length 78.3
  Top Layer w0.6: MD400.20 76.505,78.495 v1(77,78) ; R203.2 P400.4 ; P400.4 76.999,37.54 v1(77,37.541)
  Bottom Layer w0.6: v1(77,37.541) v1(77,78)
SPI_PHA: MD400.9 P401.6 | length 40.7
  Top Layer w0.6: P401.6 v1(38,43.7) ; v1(38,71.075) 42.927,71.075 43.127,71.275 MD400.9
  Bottom Layer w0.6: v1(38,43.7) v1(38,71.075)
SPI_POL: MD400.10 P401.5 | length 44.2
  Top Layer w0.6: P401.5 v1(39,41.16) ; v1(39,70) 43.559,70 44.327,70.768 44.327,71.8 MD400.10
  Bottom Layer w0.6: v1(39,41.16) v1(39,70)
SYNC: MD400.4 P401.7 | length 60
  Top Layer w0.6: v1(23,46.24) P401.7 ; v1(23.026,79.895) MD400.4
  Bottom Layer w0.6: v1(23,46.24) 23.026,46.266 v1(23.026,79.895)
TX_LED: MD400.12 P401.4 | length 48.9
  Top Layer w0.6: P401.4 30.685,38.691 v1(40,38.691) ; v1(40,69) 45.359,69 47.127,70.768 47.127,71.8 MD400.12
  Bottom Layer w0.6: v1(40,38.691) v1(40,69)
UWB_CS: J200.7 R204.1 | length 51.6
  Top Layer w0.6: v1(43,8.231) J200.7 ; v1(43.099,40.086) R204.1
  Bottom Layer w0.6: v1(43,8.231) 43,39.987 v1(43.099,40.086)
UWB_CS_R: MD400.17 P400.5 R204.2 | length 73.7
  Top Layer w0.6: MD400.17 77.705,74.295 v1(78,74) ; R204.2 61.978,40.083 67.129,40.083 P400.5 v1(78,40.08)
  Bottom Layer w0.6: v1(78,40.08) v1(78,74)
WAKE_R: MD400.2 P401.1 R401.1 | length 87.5
  Top Layer w0.6: v1(20.994,82.667) 21.022,82.695 MD400.2 ; v1(21,31) R401.1
  Bottom Layer w0.6: v1(20.994,82.667) 21,82.661 v1(21,31)
pads on no net: J200. J200.8 MD400.11 MD400.14 MD400.15 MH400.1 MH401.1 MH402.1 MH403.1

## Polygon pours and split planes (outlines as drawn)
GND on Bottom Layer "B_GND" (solid, remove dead copper, pour order 1): 0,95 95,95 95,0 0,0
3.3V on Top Layer "T_3.3V" (solid, remove dead copper, pour order 0): 95,0 95,95 0,95 0,94 0,0

## Keep-outs
Keep-Out Layer:
  the board outline again, w0.254

## Silkscreen, mask and mechanical layers (free items; w line width, h text height)
Top Overlay:
  lines w0.254: 13,11.88 27,11.88 27,22.88 13,22.88 13,11.88 ; 62,9 85,9 85,26 62,26 62,9 ; 66,84.97 87,84.97 87,93.97 66,93.97 66,84.97
  text "Alex Arovas / Robo Badgers" at 66,88 h1.52
  text "UWB Test Board" at 66,84.97 h3
  text "IRQ" at 24,48.075 h1.52
  text "GND" at 69,47.337 h1.52
  text "SYNC" at 23.815,45.737 h1.52
  text "GND" at 69.002,44.614 h1.52
  text "SPI_PHA" at 23.002,43.177 h1.52
  text "RST_N" at 69,42.271 h1.52
  text "SPI_POL" at 23.002,40.677 h1.52
  text "UWB_CS" at 69,39.737 h1.52
  text "TX_LED" at 23.03,38.148 h1.52
  text "SCLK" at 69,37.076 h1.52
  text "RX_LED" at 23.016,35.534 h1.52
  text "MISO" at 69,34.535 h1.52
  text "EXT_ON" at 23,33.271 h1.52
  text "MOSI" at 69,31.995 h1.52
  text "WAKE" at 23,30.518 h1.52
  text "3.3V" at 68.979,29.304 h1.52
  text "RESET" at 61.961,22.089 h3
  text "3.3V" at 13,19.88 h3
Mechanical 2:
  lines w0.254: 5,0 cw(c5,5) 0,5 0,90 cw(c5,90) 5,95 90,95 cw(c90,90) 95,90 95,5 cw(c90,5) 90,0 5,0 ; 5,0 5,0

## Dimensions
90,0 to 90,95 on Mechanical 1
0,5 to 95,5 on Mechanical 1

## Text inside footprints (layer, text, board x,y; h text height)
P400: Top Overlay "1" at 65.432,29.8 h1.02 r90; Top Overlay "8" at 65.432,47.32 h1.02 r90
P401: Top Overlay "1" at 28.914,30.88 h1.02 r90; Top Overlay "8" at 28.914,48.4 h1.02 r90
U400: Top Overlay "ECE 453" at 11.901,79 h1.02